# Altium PCB hazi_kiindulas.PcbDoc
Units mil, origin at the board's own origin, x right, y up, seen from the top; angles counter-clockwise.
Board outline 3550 x 2300 mil, 2 copper layers (Top Layer, Bottom Layer); 1 components, 0 nets, 84 pads, 0 vias.
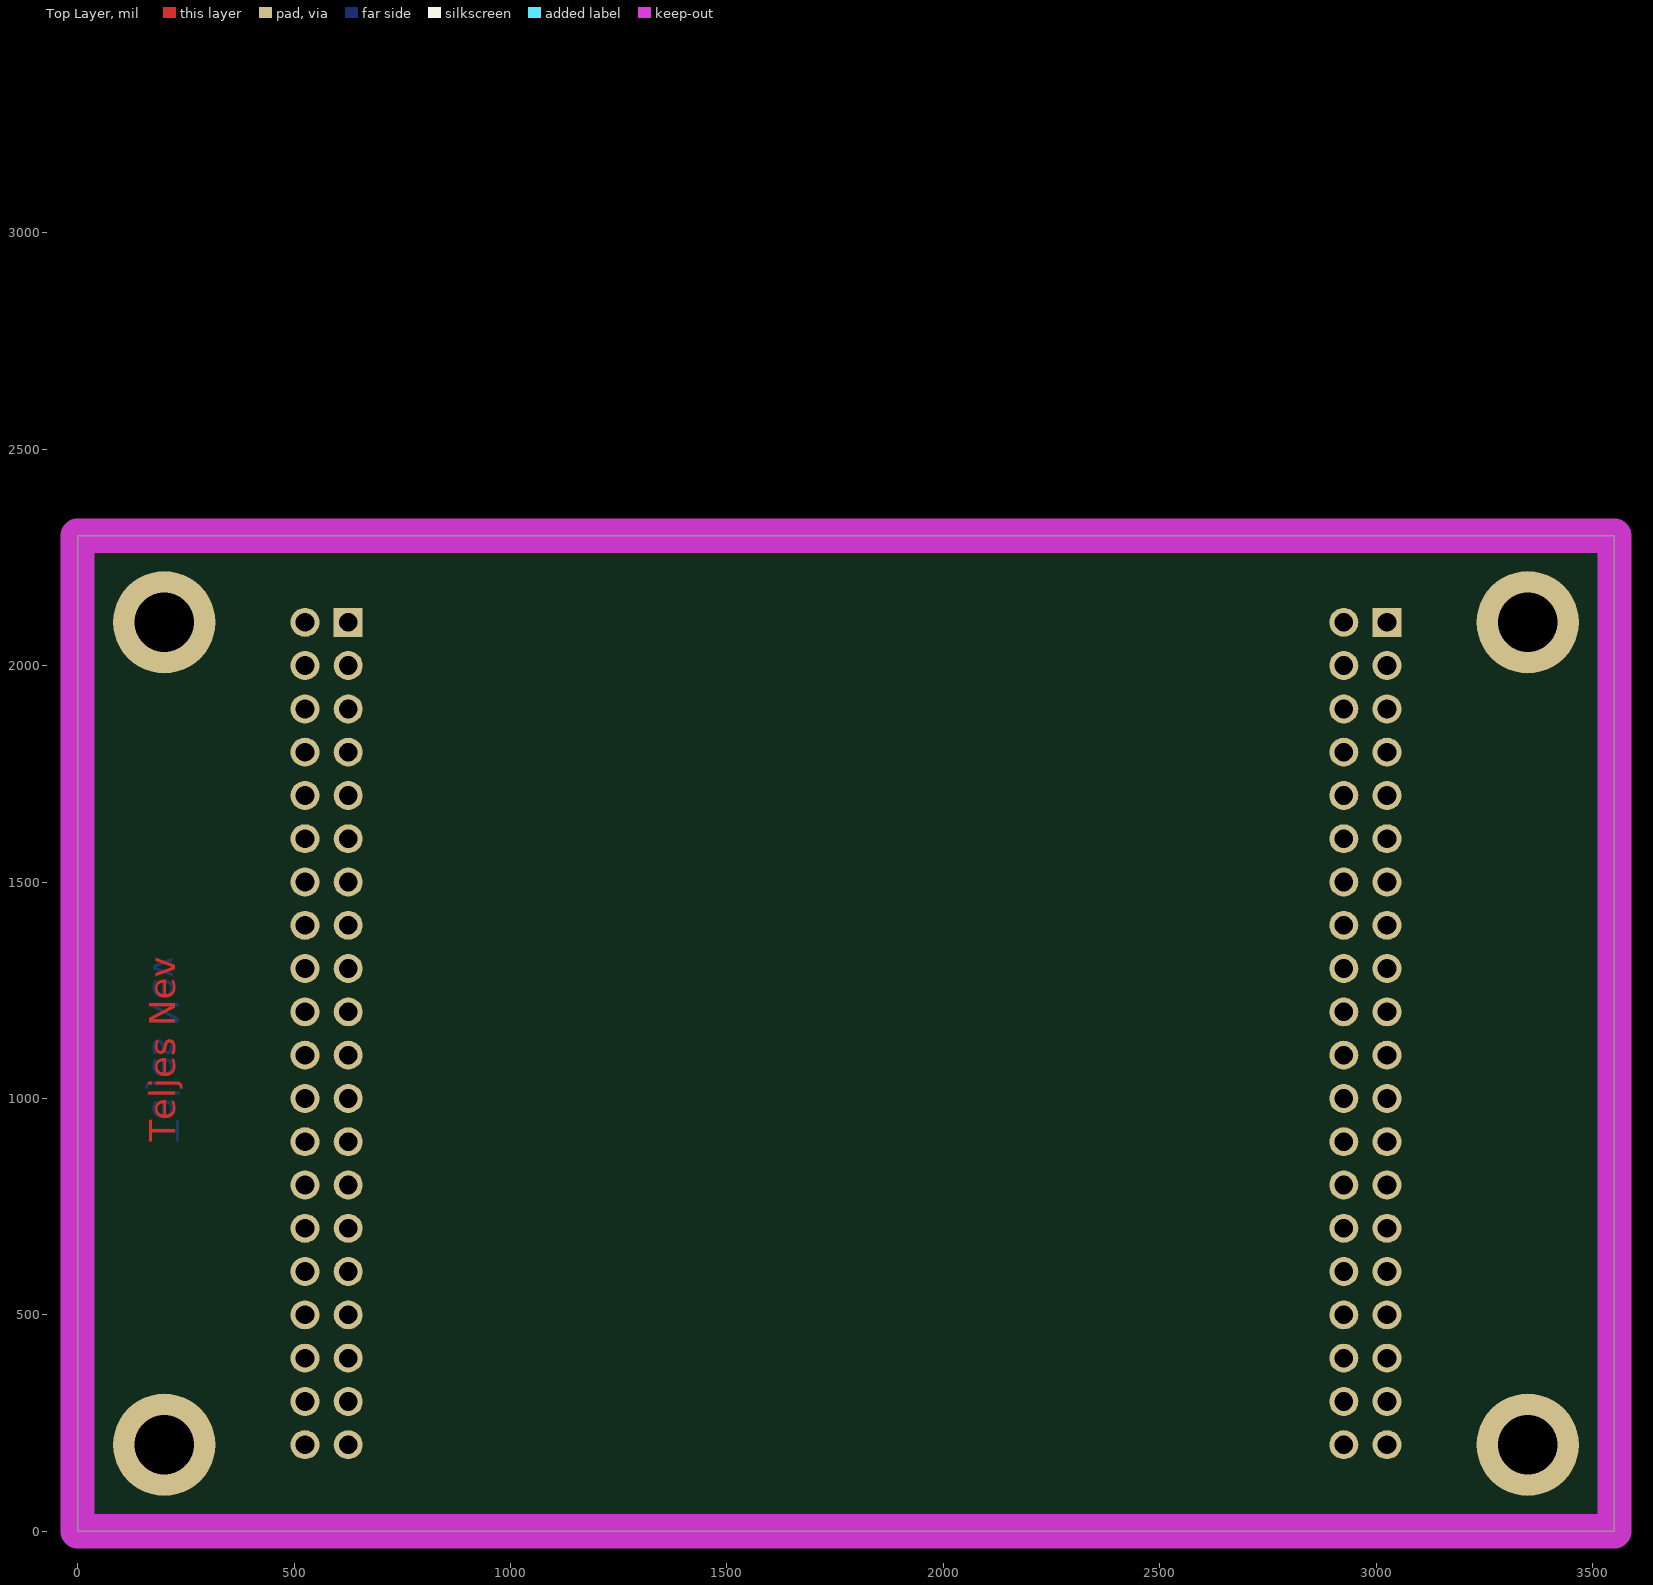
[diagram p0: Top Layer view]
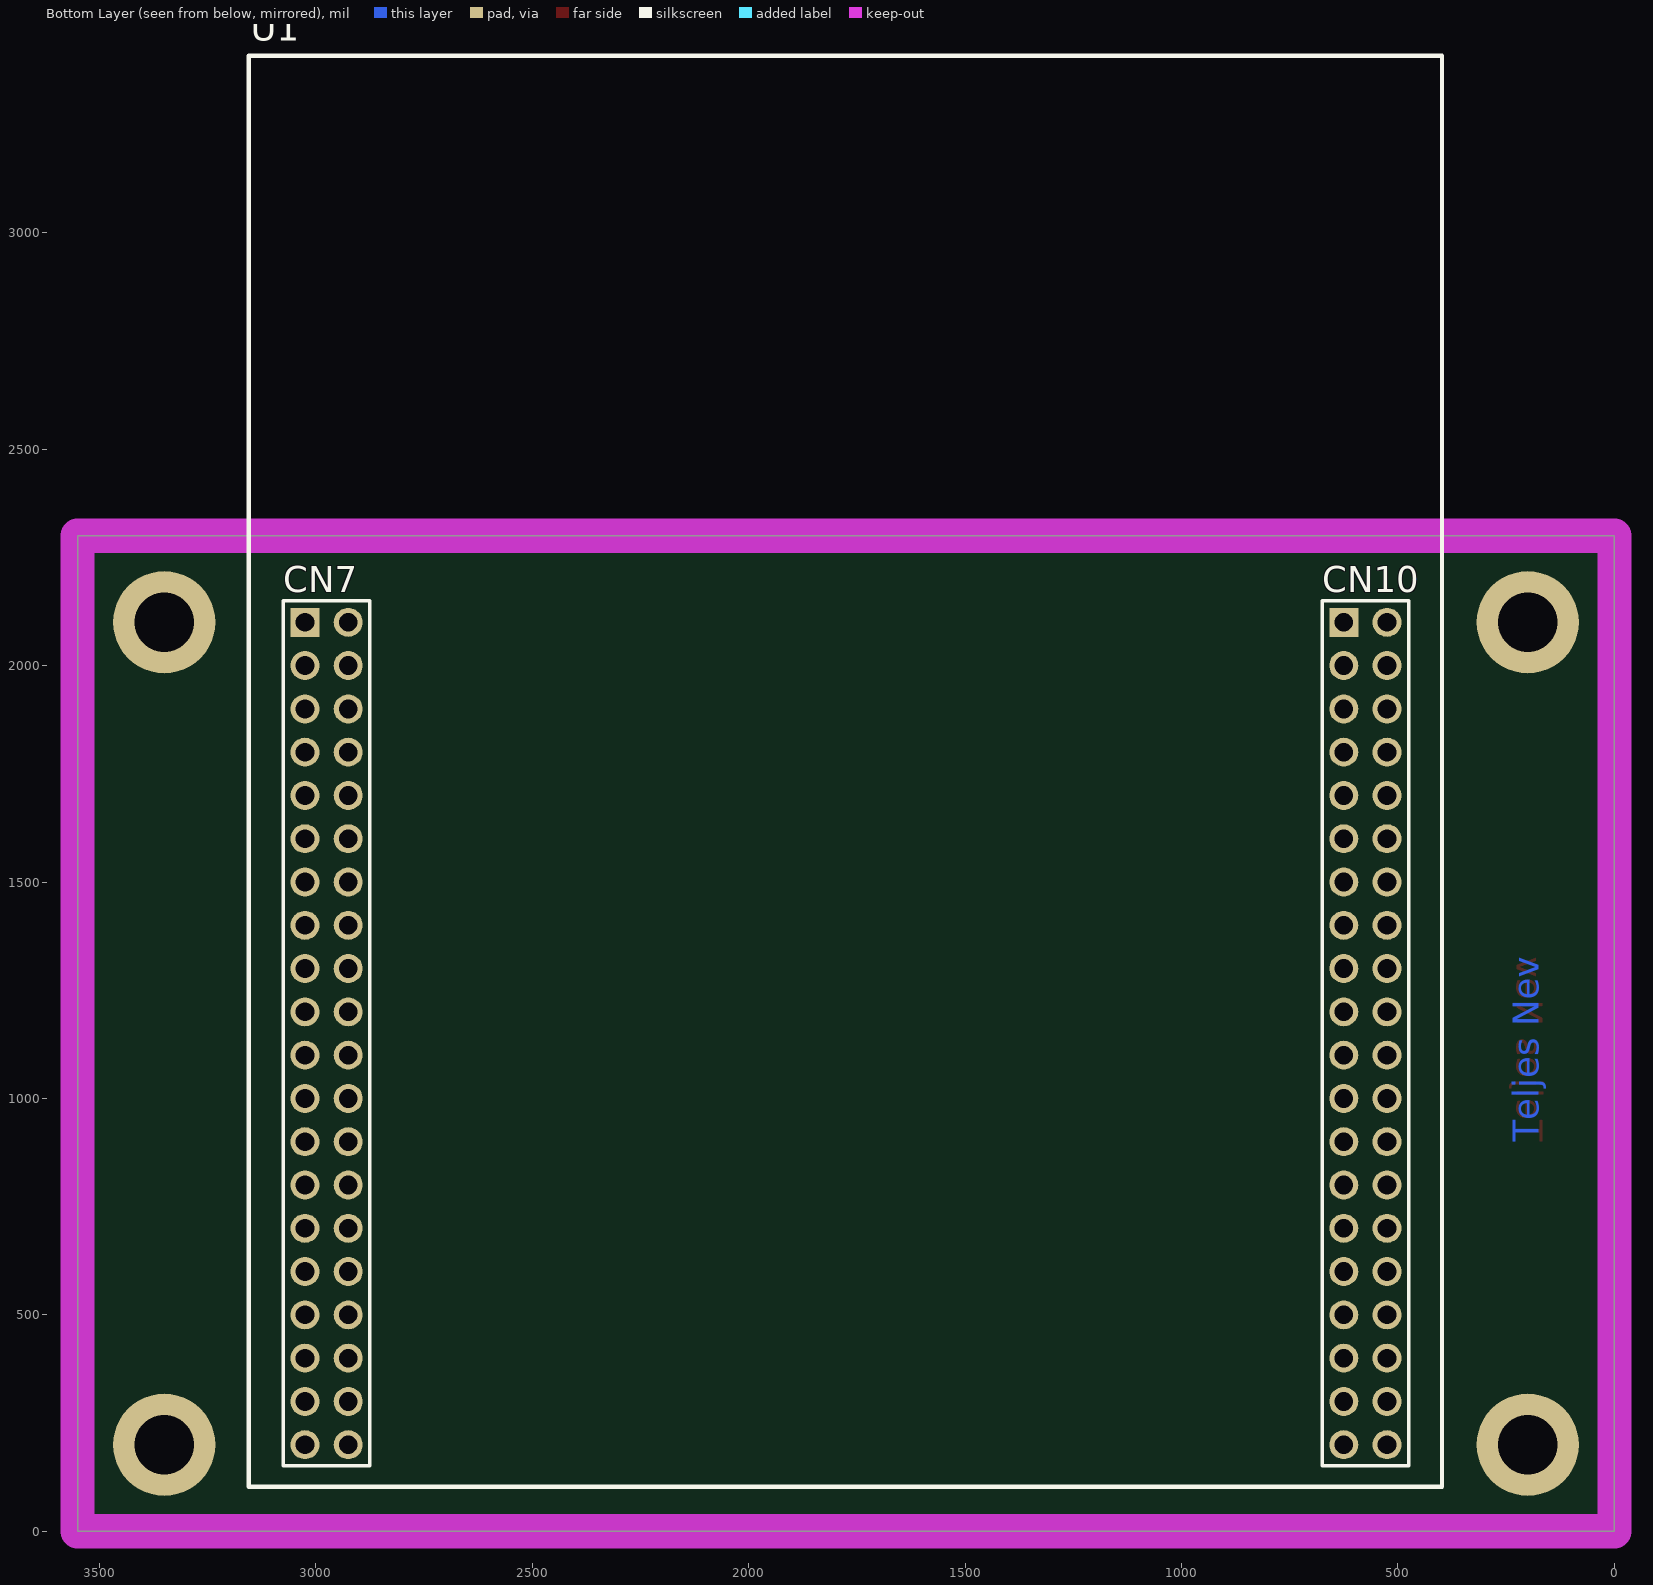
[diagram p1: Bottom Layer view, seen from below]

## Layer stack, top to bottom
Top Solder: solder mask 0.4, Solder Resist, Dk 3.5
Top Layer: signal copper 1.4
Dielectric 1: dielectric 12.6, FR-4, Dk 4.8
Bottom Layer: signal copper 1.4
Bottom Solder: solder mask 0.4, Solder Resist, Dk 3.5

## Board outline
0,0 3550,0 3550,2300 0,2300

## Design rules (kind name [scope] priority, off if disabled: settings)
Clearance [All] p1: gap=10 ignorepadtopadclearanceinfootprint=FALSE except(0: Arc-Hole Track-Hole SMDPad-Hole THPad-Hole Via-Hole Fill-Hole Poly-Hole Region-Hole Text-Hole; 20: Arc-Poly Track-Poly SMDPad-Poly THPad-Poly Via-Poly Fill-Poly Poly-Poly)
HoleSize [All] p1: absolutevalues=TRUE maxlimit=196.85 minlimit=1 maxpercent=80.000 minpercent=20.000
PolygonConnect [All] p1: connectstyle=Relief reliefconductorwidth=10 reliefentries=4 polygonreliefangle="90 Angle" airgapwidth=10
RoutingVias [All] p1: holewidth=28 width=50 viastyle="Through Hole" minholewidth=28 minwidth=50 maxholewidth=28 maxwidth=50
SolderMaskExpansion [All] p1: expansion=4 istentingtop=FALSE
Width [All] p1: maxlimit=100 minlimit=10 preferedwidth=10
29 further rules are at their usual default settings.

## Components (designator, comment, footprint, x,y, rotation, side; value= is the part's Value field where it differs from the comment)
U1 "NUCLEO-F446RE" FP_NUCLEO-64 3025,2100 r180 bottom locked

## Footprints (in the part's own frame and the unit in brackets; to place one, negate y for a bottom-side part, rotate by r counter-clockwise, add the part's x,y. Pads: shape width x height; smd on the part's side, far side on the other; paste and mask are expansions set on the pad)
FP_NUCLEO-64 [mm]
  round 1.7 hole 1.1: 0(0,-48.26) 0(2.54,-48.26) 0(60.96,-48.26) 0(63.5,-48.26) 2(2.54,0) 3(0,-2.54) 4(2.54,-2.54) 5(0,-5.08) 6(2.54,-5.08) 7(0,-7.62) 8(2.54,-7.62) 9(0,-10.16) 10(2.54,-10.16) 11(0,-12.7) 12(2.54,-12.7) 13(0,-15.24) 14(2.54,-15.24) 15(0,-17.78) 16(2.54,-17.78) 17(0,-20.32) 18(2.54,-20.32) 19(0,-22.86) 20(2.54,-22.86) 21(0,-25.4) 22(2.54,-25.4) 23(0,-27.94) 24(2.54,-27.94) 25(0,-30.48) 26(2.54,-30.48) 27(0,-33.02) 28(2.54,-33.02) 29(0,-35.56) 30(2.54,-35.56) 31(0,-38.1) 32(2.54,-38.1) 33(0,-40.64) 34(2.54,-40.64) 35(0,-43.18) 36(2.54,-43.18) 37(0,-45.72) 38(2.54,-45.72) 40(63.5,0) 41(60.96,-2.54) 42(63.5,-2.54) 43(60.96,-5.08) 44(63.5,-5.08) 45(60.96,-7.62) 46(63.5,-7.62) 47(60.96,-10.16) 48(63.5,-10.16) 49(60.96,-12.7) 50(63.5,-12.7) 51(60.96,-15.24) 52(63.5,-15.24) 53(60.96,-17.78) 54(63.5,-17.78) 55(60.96,-20.32) 56(63.5,-20.32) 57(60.96,-22.86) 58(63.5,-22.86) 59(60.96,-25.4) 60(63.5,-25.4) 61(60.96,-27.94) 62(63.5,-27.94) 63(60.96,-30.48) 64(63.5,-30.48) 65(60.96,-33.02) 66(63.5,-33.02) 67(60.96,-35.56) 68(63.5,-35.56) 69(60.96,-38.1) 70(63.5,-38.1) 71(60.96,-40.64) 72(63.5,-40.64) 73(60.96,-43.18) 74(63.5,-43.18) 75(60.96,-45.72) 76(63.5,-45.72)
  rect 1.7x1.7 hole 1.1: 1(0,0) 39(60.96,0)
  silkscreen extent -3.3,-50.72 66.72,33.25, body extent -3.3,-50.72 66.72,33.25, height 11

## Free pads (board coordinates)
  round 236.22 hole 137.8: ""(200,200) ""(200,2100) ""(3350,200) ""(3350,2100)

## Nets (pads, with @x,y where several pads share a name; then routed paths per layer and width w, separated by ;. In a path a pad name is that pad's centre, name@x,y a point inside that pad or via, vN(x,y) a via of type N, cw(c..) or ccw(c..) an arc to the next point about the centre after c; other vN are vias at no path point)
pads on no net: U1.0 U1.1 U1.2 U1.3 U1.4 U1.5 U1.6 U1.7 U1.8 U1.9 U1.10 U1.11 U1.12 U1.13 U1.14 U1.15 U1.16 U1.17 U1.18 U1.19 U1.20 U1.21 U1.22 U1.23 U1.24 U1.25 U1.26 U1.27 U1.28 U1.29 U1.30 U1.31 U1.32 U1.33 U1.34 U1.35 U1.36 U1.37 U1.38 U1.39 U1.40 U1.41 U1.42 U1.43 U1.44 U1.45 U1.46 U1.47 U1.48 U1.49 U1.50 U1.51 U1.52 U1.53 U1.54 U1.55 U1.56 U1.57 U1.58 U1.59 U1.60 U1.61 U1.62 U1.63 U1.64 U1.65 U1.66 U1.67 U1.68 U1.69 U1.70 U1.71 U1.72 U1.73 U1.74 U1.75 U1.76

## Keep-outs
Keep-Out Layer:
  the board outline again, w78.74

## Other copper
Top Layer:
  text "Teljes Nev" at 225,900 h60 r90
Bottom Layer:
  text "Teljes Nev" at 175,900 h60 r270

## Silkscreen, mask and mechanical layers (free items; w line width, h text height)
Mechanical 1:
  the board outline again, w10

## Text inside footprints (layer, text, board x,y; h text height)
U1: Bottom Overlay "CN10" at 675,2170 h60; Bottom Overlay "CN7" at 3075,2170 h60